# Altium PCB TX-Module-PCB.PcbDoc
Units mil, origin at the board's own origin, x right, y up, seen from the top; angles counter-clockwise.
Board outline 1978.53 x 3238.38 mil, 2 copper layers (Top Layer, Bottom Layer); 14 components, 17 nets, 76 pads, 13 vias.
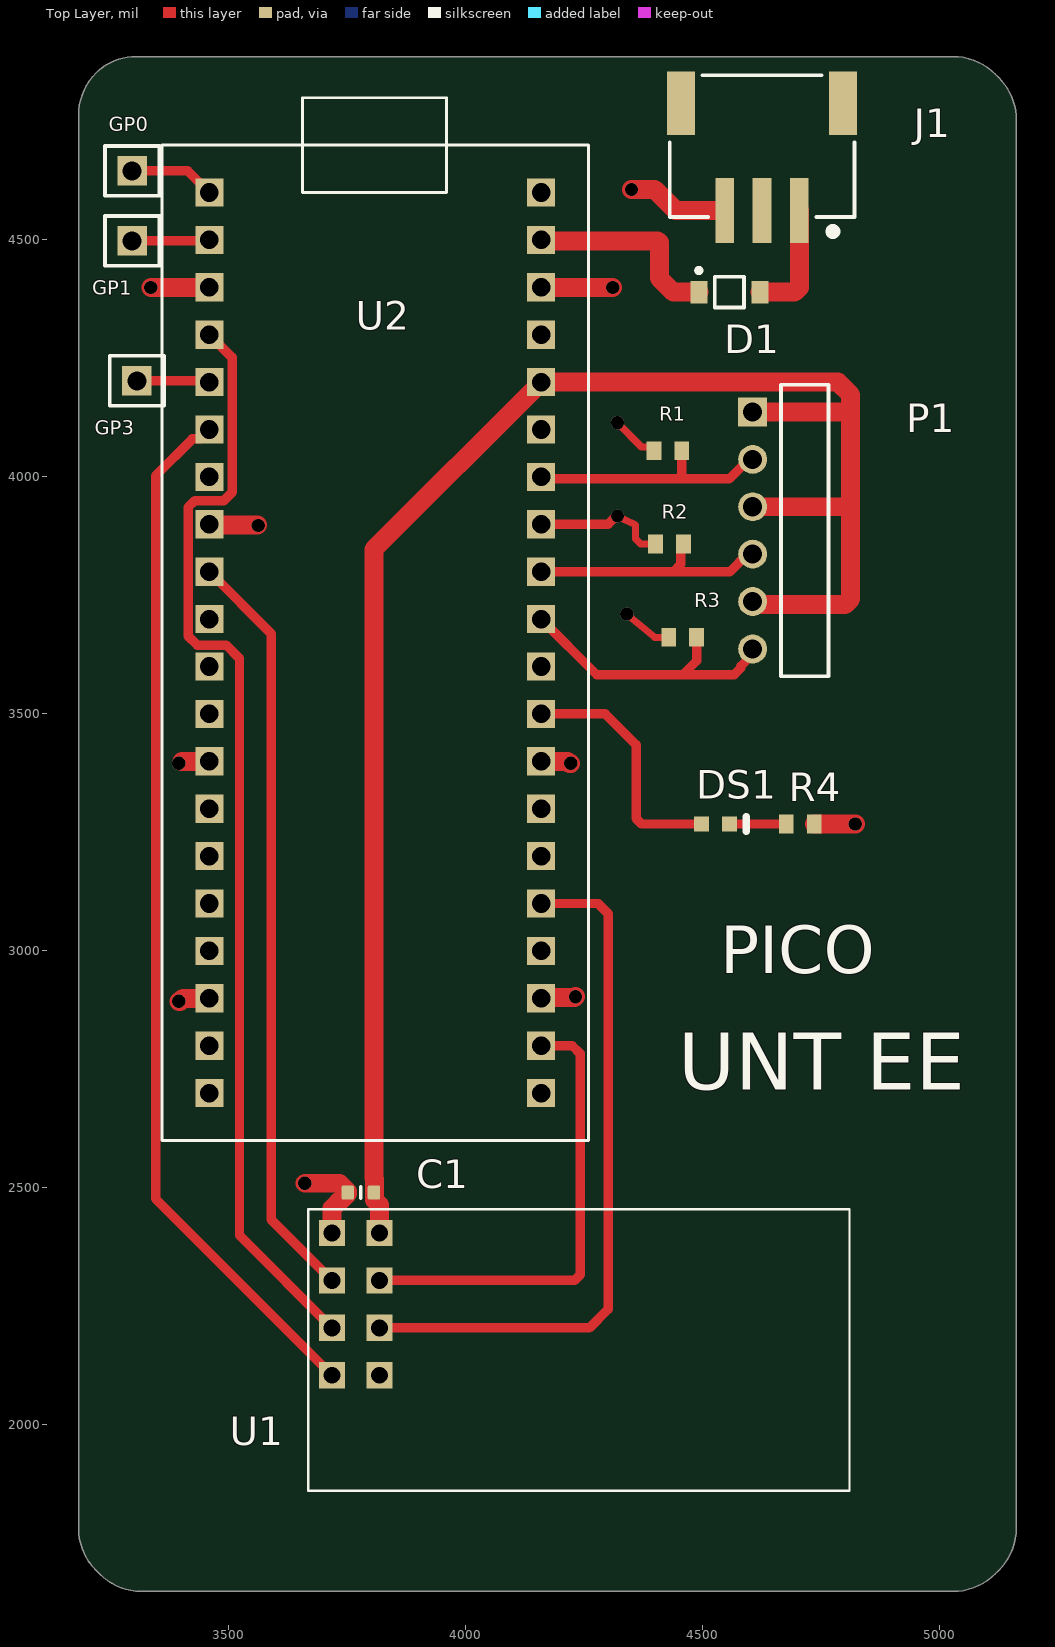
[diagram p0: Top Layer view]
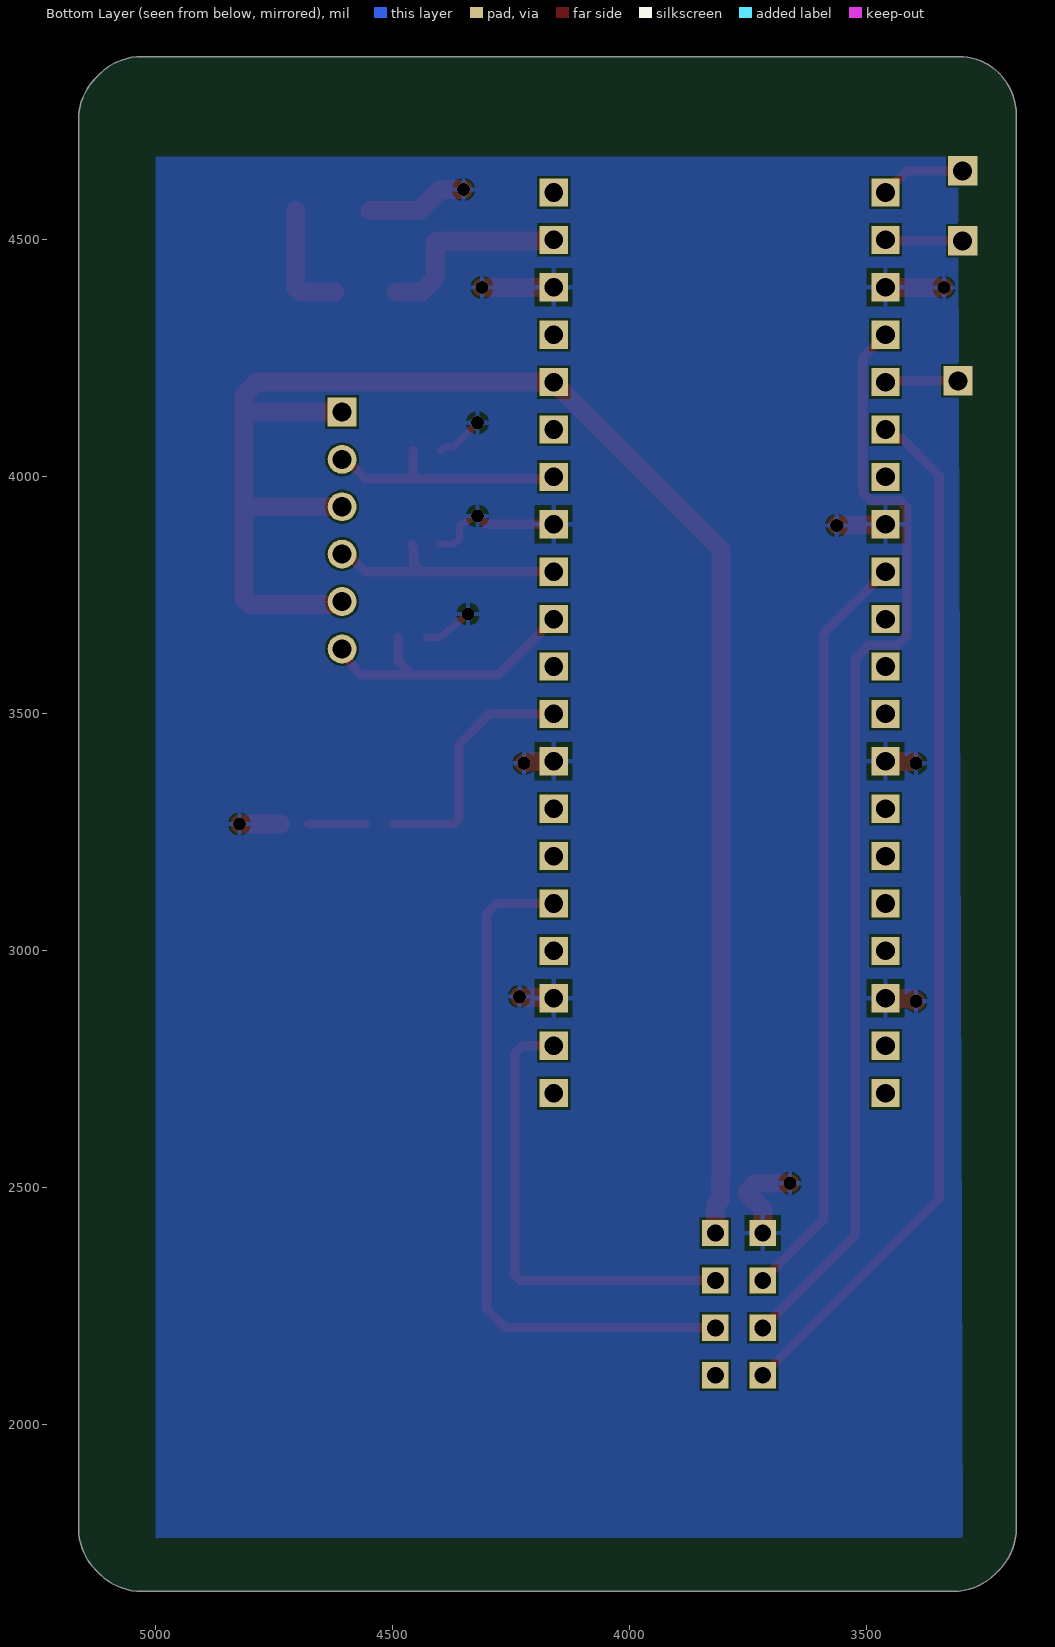
[diagram p1: Bottom Layer view, seen from below]
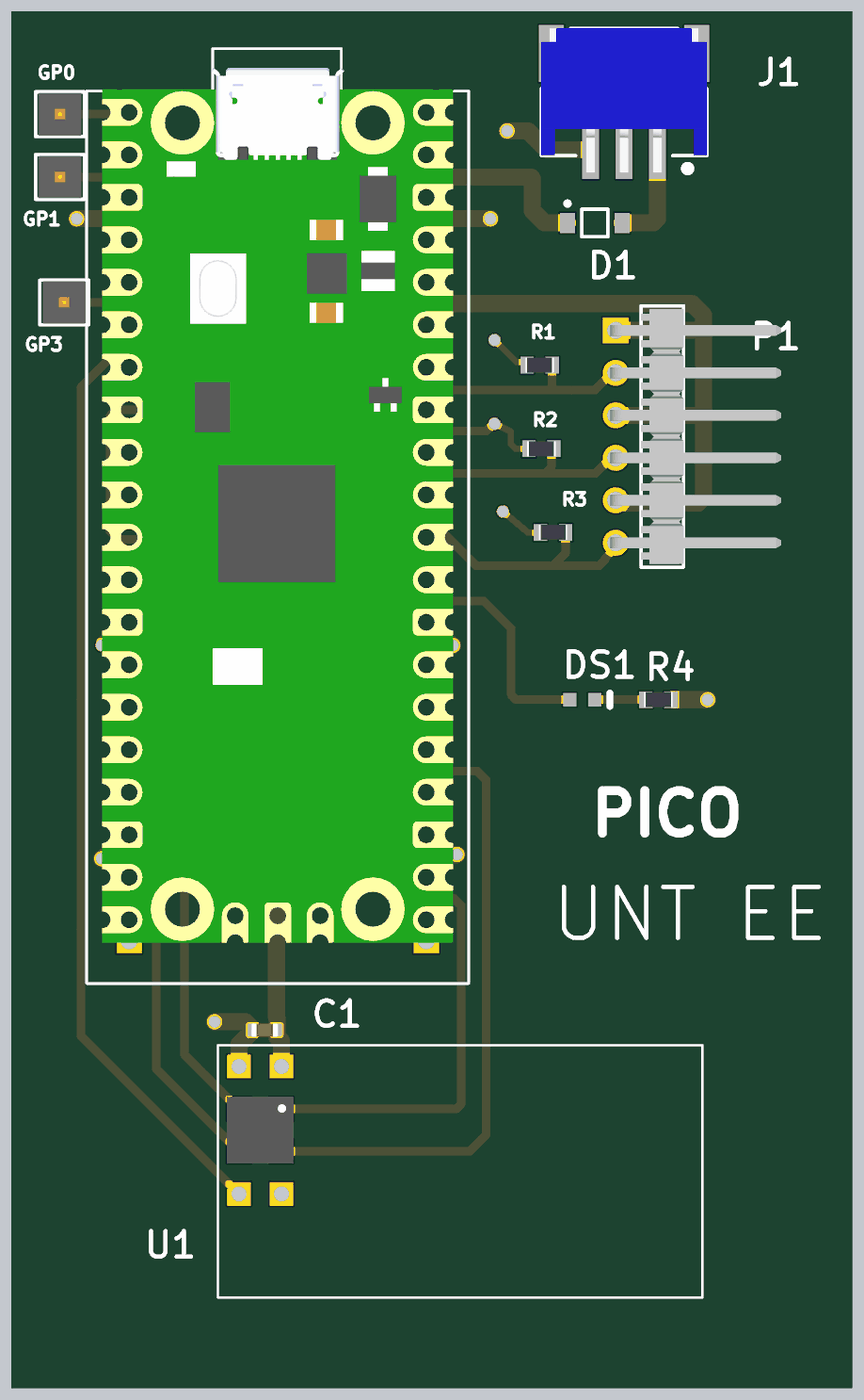
[diagram p2: 3D render of the assembled board from above, using the file's embedded part models]

## Layer stack, top to bottom
Top Solder: solder mask 0.4, Solder Resist, Dk 3.5
Top Layer: signal copper 1.4
Dielectric 1: dielectric 12.6, FR-4, Dk 4.8
Bottom Layer: signal copper 1.4
Bottom Solder: solder mask 0.4, Solder Resist, Dk 3.5

## Board outline
3220.79,1693.38 3228.82,1685.35 ccw(c3317.72,1774.25) 3304.55,1649.22 3307.09,1648.53 5028.74,1648.53 ccw(c5028.74,1774.25) 5117.58,1685.29 5117.64,1685.35 5125.67,1693.38 5125.74,1693.45 ccw(c5036.77,1782.28) 5162.5,1782.28 5162.49,1782.34 5162.5,4724.41 5162.5,4753.15 ccw(c5036.77,4753.15) 5125.67,4842.05 5117.64,4850.08 ccw(c5028.74,4761.18) 5028.74,4886.9 3305.31,4886.9 ccw(c3305.31,4767.37) 3220.79,4851.89 ccw(c3309.69,4762.99) 3183.96,4762.99 3183.96,1782.28 3183.96,1782.22 ccw(c3309.69,1782.28)

## Design rules (kind name [scope] priority, off if disabled: settings)
BoardOutlineClearance [All] p1: gap=10 ignorepadtopadclearanceinfootprint=FALSE
Clearance [All] p1: gap=5 ignorepadtopadclearanceinfootprint=FALSE
HoleSize [All] p1: absolutevalues=TRUE maxlimit=100 minlimit=11.81 maxpercent=80.000 minpercent=20.000
HoleToHoleClearance [All] p1: gap=9.84 allowstackedmicrovias=TRUE
PolygonConnect [All] p1: connectstyle=Relief reliefconductorwidth=10 reliefentries=4 polygonreliefangle="90 Angle" airgapwidth=10
RoutingVias [All] p1: holewidth=12 width=24 viastyle="Through Hole" minholewidth=12 minwidth=23.62 maxholewidth=12 maxwidth=50
SilkToSilkClearance [All] p1: silktosilkclearance=4
SilkToSolderMaskClearance [IsPad] p1: minsilkscreentomaskgap=4 clearancetoexposedcopper=TRUE
SolderMaskExpansion [All] p1: expansion=4 istentingtop=FALSE
SupplyNets "Schematic Supply Nets_1" [InNet('+3.3V')] p1: voltage=0.000
SupplyNets "Schematic Supply Nets" [InNet('GND')] p2: voltage=0.000
Width [All] p1: maxlimit=50 minlimit=5 preferedwidth=6 minimp=50.000000 maximp=50.000000 favimp=50.000000
26 further rules are at their usual default settings.

## Components (designator, comment, footprint, x,y, rotation, side; value= is the part's Value field where it differs from the comment)
C1 "Capacitor 10µF +/-20% 10V 0603" CAPC0603(1608)100_L 3779.53,2490.16 r0 top value=10µF
D1 "MBR120VLSFT1G" ONSC-SOD-123FL-2-498-01_V 4557.09,4389.76 r0 top
DS1 "19-217/R6C-AL1M2VY/3T" EVRL-0603-2_V 4527.56,3267.72 r0 top
GP0 "TSW-101-07-L-S" FP-TSW-101-07-L-S-MFG 3297.24,4645.67 r0 top (schematic designator J4)
GP1 "TSW-101-07-L-S" FP-TSW-101-07-L-S-MFG 3297.24,4498.03 r0 top (schematic designator J3)
GP3 "TSW-101-07-L-S" FP-TSW-101-07-L-S-MFG 3307.09,4202.76 r0 top (schematic designator J2)
J1 "S3B-PH-SM4-TB(LF)(SN)" JST-S3B-PH-SM4-TB-3_V 4625.98,4675.2 r180 top
P1 "TSW-106-08-G-S-RA" SMTC-TSW-106-08-X-S-RA 4606.3,4137.01 r270 top
R1 "Resistor 10k +/-1% 0603 100 mW" RESC1608X55X25ML10T15 4427.17,4055.12 r0 top value=10k
R2 "Resistor 10k +/-1% 0603 100 mW" RESC1608X55X25ML10T15 4431.1,3858.27 r0 top value=10k
R3 "Resistor 10k +/-1% 0603 100 mW" RESC1608X55X25ML10T15 4458.66,3661.42 r0 top value=10k
R4 "Resistor 1k +/-1% 0603 100 mW" RESC1608X55X25ML10T15 4706.69,3267.72 r0 top value=330
U1 "NRF24L01+" NRF24L01-PCB-AERIAL 3768.9,2254.72 r270 top
U2 "RASPBERRY_PI_PICO" RASPBERRY_PI_PICO 3810,3700 r0 top

## Footprints (in the part's own frame and the unit in brackets; to place one, negate y for a bottom-side part, rotate by r counter-clockwise, add the part's x,y. Pads: shape width x height; smd on the part's side, far side on the other; paste and mask are expansions set on the pad)
CAPC0603(1608)100_L [mm] "Chip Capacitor, Body 1.6x0.8mm, Height 1.0mm, IPC High Density"
  rrect25% 0.66x0.76 smd: 1(-0.7,0) 2(0.7,0)
  silkscreen extent 0,-0.3 0,0.3, body extent -0.8,-0.4 0.8,0.4, height 0.95
EVRL-0603-2_V [mm] "SMD, 2-Leads, Body 1.6x0.8mm"
  rect 0.8x0.8 smd: 1(-0.75,0) 2(0.75,0)
  silkscreen extent 1.65,-0.4 1.65,0.4, body extent -0.8,-0.4 0.8,0.4, height 0.5
FP-TSW-101-07-L-S-MFG [mm]
  rect 1.57x1.57 hole 1.02 paste-2539.97 mask+0: 1(0,0)
  silkscreen extent -1.46,-1.34 1.46,1.34, body extent -1.56,-1.44 1.56,1.44, height 0.25
JST-S3B-PH-SM4-TB-3_V [mm] "Header, 3-Leads, Body 9.9x7.6mm, Pitch 2mm, JST"
  rect 1x3.5 smd: 1(-2,2.875) 2(0,2.875) 3(2,2.875)
  rect 1.5x3.4 smd: NC1(-4.35,-2.875) NC2(4.35,-2.875)
  silkscreen extent -4.95,-4.37 4.95,4.2, body extent -4.95,-4.37 4.95,4.23, height 5.6
NRF24L01-PCB-AERIAL [mm]
  rect 1.408x1.408 / inner round 1.408 / far side rect 1.408x1.408 hole 0.9: P$1(-3.81,-1.27) P$2(-3.81,1.27) P$3(-1.27,-1.27) P$4(-1.27,1.27) P$5(1.27,-1.27) P$6(1.27,1.27) P$7(3.81,-1.27) P$8(3.81,1.27)
  silkscreen extent -5.08,-2.54 10,26.46, body extent -2,-2 2,2, height 0.95
ONSC-SOD-123FL-2-498-01_V [mm] "SOD, 2-Leads, Body 2.7x1.65mm"
  rect 0.91x1.22 smd: 1(-1.635,0) 2(1.635,0)
  silkscreen extent -1.76,-0.82 0.78,1.28, body extent -1.35,-0.82 1.35,0.82, height 1
RASPBERRY_PI_PICO [mm]
  rect 1.508x1.508 / inner round 1.508 / far side rect 1.508x1.508 hole 1: 3V3(8.89,12.7) 3V3_EN(8.89,15.24) ADC_VREF(8.89,10.16) AGND(8.89,5.08) GND(8.89,17.78) GND2(8.89,-7.62) GND3(8.89,-20.32) GND4(-8.89,17.78) GND5(-8.89,5.08) GND6(-8.89,-7.62) GND7(-8.89,-20.32) GP0(-8.89,22.86) GP1(-8.89,20.32) GP2(-8.89,15.24) GP3(-8.89,12.7) GP4(-8.89,10.16) GP5(-8.89,7.62) GP6(-8.89,2.54) GP7(-8.89,0) GP8(-8.89,-2.54) GP9(-8.89,-5.08) GP10(-8.89,-10.16) GP11(-8.89,-12.7) GP12(-8.89,-15.24) GP13(-8.89,-17.78) GP14(-8.89,-22.86) GP15(-8.89,-25.4) GP16(8.89,-25.4) GP17(8.89,-22.86) GP18(8.89,-17.78) GP19(8.89,-15.24) GP20(8.89,-12.7) GP21(8.89,-10.16) GP22(8.89,-5.08) GP26_A0(8.89,0) GP27_A1(8.89,2.54) GP28_A2(8.89,7.62) RUN(8.89,-2.54) VBUS(8.89,22.86) VSYS(8.89,20.32)
  silkscreen extent -11.43,-27.94 11.43,27.94, body extent -10.5,-25.5 10.5,26.8, height 3.73
RESC1608X55X25ML10T15 [mm] "Chip Resistor, 2-Leads, Body 1.70x0.90mm, IPC Low Density"
  rect 0.8x1 smd: 1(-0.75,0) 2(0.75,0)
  body extent -0.85,-0.45 0.85,0.45, height 0.55
SMTC-TSW-106-08-X-S-RA [mm] ".025 SQ Post Terminal Strip Assembly, 1x6 Pins, Right Angle, 2.54mm Pitch, Male"
  rect 1.55x1.55 hole 1.02: 1(0,0)
  round 1.55 hole 1.02: 2(2.54,0) 3(5.08,0) 4(7.62,0) 5(10.16,0) 6(12.7,0)
  silkscreen extent -1.46,1.52 14.16,4.06, body extent -1.27,-0.32 13.97,9.9, height 3.05

## Part data
C1: library part CMP-001-00075-4, "Chip Capacitor, 10µF +/-20%, 10V, 0603, Thickness 1 mm", Case/Package=0603, Max Operating Temperature=85°C, Min Operating Temperature=-55°C, Tolerance=10%, Voltage Rating=10V, Mounting Technology=SMT, Pins=2
D1: library part CMP-1055-00449-1, "Schottky Power Rectifier, 2-Pin SOD-123, Pb-Free, Tape and Reel", Manufacturer="On Semiconductor", ComponentLink1Description="Manufacturer URL", ComponentLink1URL=http://www.onsemi.com/, ComponentLink2Description=Datasheet, ComponentLink2URL=http://www.onsemi.cn/pub_link/Collateral/MBR120VLSFT1-D.PDF, ComponentLink3Description="Package Specification", ComponentLink3URL=http://www.onsemi.cn/pub_link/Collateral/MBR120VLSFT1-D.PDF, Configuration=Single, DatasheetVersion="Rev. 2", IFSM Max (A)=45, Mounting Technology="Surface Mount", PackageDescription="2-Pin SOD, Body 1.65 x 2.7 mm", PackageReference=SOD-123FL-2-498-01, PackageVersion="Rev. A", Packing="Tape and Reel", PartNumber=MBR120VLSFT1G, RoHS=TRUE
DS1: library part CMP-007-00004-2, "Chip LED, Red, 5 V, 25 mA, -40 to 85 degC, 2-Pin SMD (0603), RoHS, Tape and Reel", Case/Package=0603, Colour=Red, Forward Voltage=2.2V, Manufacturer="Everlight Electronics", Package Description="2-Pin Surface Mount Device, Body 1.6 x 0.8 mm", Datasheet URL=https://datasheet.ciiva.com/4688/el-19-217-r6c-al1m2vy-3tpdf-187026-4688713.pdf, Datasheet Version="Rev. 1, 01/2005", Lens Style=Clear, Manufacturer URL=http://www.everlight.com/, Mounting Technology=SM, Package Reference=0603, RoHS Compliant=False
GP0 GP1 GP3: library part CMP-02766-001775-1, "CONN HEADER VERT 1POS", Color=Black, Flammability Rating="UL94 V-0", Max Current Rating=7.6A, Max Operating Temperature=125°C, Max Voltage Rating (AC)=550V, Min Operating Temperature=-55°C, Connector Type=Header, Contact Finish - Mating=GOLD, Contact Material=Bronze, Contact Mating Length=0.23inch, Contact Plating=Gold, Contact Shape=Square, Contact Type="Male Pin", Depth=2.54mm, Fastening Type=Pull, Gender=Male, Housing Color=Black, Housing Material=Polyester, Insulation Color=Black, Insulation Material=PBT, Lead Free="Lead Free", Length=2.54mm, Mount="Through Hole", Number of Contacts=1, Number of Positions=1, Number of Rows=1, Orientation=Straight, Packaging=Bulk, Radiation Hardening=No, Reach SVHC Compliant=Yes, RoHS Compliant=Yes, Series=TSW, Termination=Solder, Width=2.54mm
J1: library part JST_S3B-PH-SM4-TB, "Conn., PCB to wire (battery), right angle, SMT, 2mm pitch, low profile, 2A per pin, 3Circuits", Manuf1=JST, Source1Partnumber=455-1750-1-ND, Source2Partnumber=455-1750-2-ND, ComponentLink1Description="Manufacturer Web", ComponentLink2Description="Datasheet Web", ComponentLink3Description="Digikey Web", LatestRevisionDate=23-October-2017, Manuf1Partnumber=S3B-PH-SM4-TB(LF)(SN), Populated=Yes, RoHS=Yes, Source1=Digikey, Source1Price=0.4929, Source1Qty=100, Source2=Digikey, Source2Price=0.26302, Source2Qty=10000
P1: library part CMP-1024-00387-1, "0.025\" SQ Post Header, Through-hole, Right Angle, -55 to 125 degC, 2.54 mm Pitch, 6-Pin, Male, RoHS", Manufacturer=Samtec, Temperature Range="-55 to 125 degC", ComponentLink1Description="Manufacturer URL", ComponentLink1URL=http://www.samtec.com, ComponentLink2Description=Datasheet, ComponentLink2URL=http://www.samtec.com/documents/webfiles/pdf/TSW_TH.PDF, ComponentLink3Description="Package Specification", ComponentLink3URL=http://www.samtec.com/documents/webfiles/cpdf/TSW-XXX-XX-XXX-X-XX-XXX-MKT.pdf, DatasheetVersion=F-214, Mounting Technology=Through-hole, Orientation="Right Angle", PackageDescription=".025[0.64] SQ. Post Terminal Strip Assembly", PackageReference=TSW-106-08-X-S-RA, PackageVersion="DM, 8/1988", PartNumber=TSW-106-08-G-S-RA, Pitch="2.54 mm", RoHS=True
R1 R2 R3: library part CMP-009-00017-5, "Chip Resistor, 10 KOhm, +/- 1%, 01 W, -55 to 155 degC, 0603 (1608 Metric)", Case/Package=0603, Max Operating Temperature=155°C, Min Operating Temperature=-55°C, Power=100mW, Tolerance=1%, Voltage Rating=50V, Mounting Technology=SM, Pins=2, RoHS Compliant=True
R4: library part CMP-009-00014-5, "Chip Resistor, 1 KOhm, +/-1%, 0.1 W, -55 to 155 degC, 0603 (1608 Metric)", Case/Package=0603, Max Operating Temperature=155°C, Min Operating Temperature=-55°C, Power=100mW, Tolerance=1%, Voltage Rating=50V, Mounting Technology=SM, Pins=2, RoHS Compliant=True
U1: "IC RF TxRx Only General ISM > 1GHz 2.4GHz 20-VFQFN Exposed Pad", Package="QFN-20 Nordic Semiconductor", Check_prices=https://www.snapeda.com/parts/NRF24L01+/Nordic+Power/view-part/?ref=eda, MF="Nordic Semiconductor", MP=NRF24L01+, SnapEDA_Link=https://www.snapeda.com/parts/NRF24L01+/Nordic+Power/view-part/?ref=snap
U2: "Raspberry Pi Board, Arm Cortex-M0+; Core Architecture:Arm; Core Sub-Architecture:Cortex-M0+; Kit Contents:Raspberry Pi Pico Board; No. Of Bits:32Bit; Silicon Core Number:Rp2040; Silicon Manufacturer:Raspberry Pi", Package=None, Check_prices=https://www.snapeda.com/parts/RASPBERRY%20PI%20PICO/Raspberry+Pi/view-part/?ref=eda, MF="Raspberry Pi", MP="RASPBERRY PI PICO", SnapEDA_Link=https://www.snapeda.com/parts/RASPBERRY%20PI%20PICO/Raspberry+Pi/view-part/?ref=snap

## Via types
v1: diameter 28, hole 28, Top Layer to Bottom Layer, 13 vias

## Nets (pads, with @x,y where several pads share a name; then routed paths per layer and width w, separated by ;. In a path a pad name is that pad's centre, name@x,y a point inside that pad or via, vN(x,y) a via of type N, cw(c..) or ccw(c..) an arc to the next point about the centre after c; other vN are vias at no path point)
+3.3V: C1.2 P1.1 P1.3 P1.5 U1.P$2 U2.3V3 | length 3670.6
  Top Layer w40: U1.P$2 3818.9,2464.18 3808.35,2474.73 3808.35,2518.42 3807.09,2519.69 3807.09,3847.09 U2.3V3 4786.22,4200 4812.99,4173.23 4812.99,4133.86 ; P1.5 4612.99,3730.32 4801.28,3730.32 4812.99,3742.03 4812.99,3937.01 ; P1.3 4812.99,3937.01 ; P1.1 4809.84,4137.01 4812.99,4133.86 ; 4812.99,3937.01 4812.99,4133.86
FLEX_1: P1.2 R1.2 U2.GP28_A2 | length 527.2
  Top Layer w20: U2.GP28_A2 4163.94,3996.06 4448.82,3996.06 ; R1.2 4456.69,4003.94 4448.82,3996.06 ; P1.2 4598.03,4037.01 4557.09,3996.06 4448.82,3996.06
FLEX_2: P1.4 R2.2 U2.GP27_A1 | length 528.9
  Top Layer w20: U2.GP27_A1 4438.98,3800 ; R2.2 4454.88,3852.52 4454.88,3815.91 4438.98,3800 ; P1.4 4595.2,3837.01 4558.19,3800 4438.98,3800
FLEX_3: P1.6 R3.2 U2.GP26_A0 | length 617.1
  Top Layer w20: U2.GP26_A0 4277.32,3582.68 4458.66,3582.68 ; R3.2 4488.19,3612.2 4458.66,3582.68 ; P1.6 4606.3,3625.91 4581.07,3600.68 4581.07,3596.82 4566.93,3582.68 4458.66,3582.68
GND: C1.1 J1.3 R1.1 R2.1 R3.1 R4.2 U1.P$1 U2.AGND U2.GND U2.GND2 U2.GND3 U2.GND4 U2.GND5 U2.GND6 U2.GND7 | length 1646.4
  Top Layer w15: v1(4320.87,3917.32) 4359,3898.87 4359,3869.34 4370.08,3858.27 R2.1 ; v1(4320.87,4114.17) 4372.35,4062.69 4390.07,4062.69 R1.1 ; v1(4340.55,3710.63) 4399.61,3661.42 R3.1
  Top Layer w20: v1(3336.61,4399.61) v1@3336.81,4399.8 ; v1(3395.67,3395.67) 3397.83,3395.67 v1@3402.16,3400 ; U2.GND4@3459.8,4399.8 U2.GND4 ; U2.GND5 U2.GND5@3461.18,3898.82 ; v1@3561.81,3898.82 v1(3562.99,3897.64) ; U2.AGND 4301.38,3900 4318.7,3917.32 v1(4320.87,3917.32) ; U2.GND U2.GND@4160.2,4399.8 ; v1@4310.83,4399.8 v1(4311.02,4399.61)
  Top Layer w40: v1@3336.81,4399.8 U2.GND4@3459.8,4399.8 ; v1(3395.67,2893.7) 3397.83,2893.7 3404.13,2900 U2.GND7 ; v1@3402.16,3400 U2.GND6 ; U2.GND5@3461.18,3898.82 v1@3561.81,3898.82 ; v1(3661.42,2509.84) 3734.24,2509.84 3751.97,2492.12 C1.1 3751.97,2488.2 3734.83,2471.06 3732.87,2471.06 3718.9,2457.09 U1.P$1 ; U2.GND3 4162.01,2902.01 4230.75,2902.01 v1(4232.28,2903.54) ; U2.GND2 4215.95,3400 4220.28,3395.67 v1(4222.44,3395.67) ; U2.GND@4160.2,4399.8 v1@4310.83,4399.8 ; v1(4350.39,4606.3) 4399.61,4606.3 4443.9,4562.01 J1.3 ; R4.2 v1(4822.83,3267.72)
LED_IN: DS1.1 U2.GP22 | length 525.4
  Top Layer w20: U2.GP22 4295.28,3500 4360.24,3435.04 4360.24,3279.43 4371.95,3267.72 DS1.1
NetD1_1: D1.1 U2.VSYS | length 422.4
  Top Layer w40: U2.VSYS 4161.97,4498.03 4405.93,4498.03 4409.45,4494.52 4409.45,4419.29 4438.98,4389.76 D1.1
NetD1_2: D1.2 J1.1 | length 249.7
  Top Layer w40: D1.2 4694.88,4389.76 4704.72,4399.61 J1.1
NetDS1_2: DS1.2 R4.1 | length 120.1
  Top Layer w20: DS1.2 R4.1
RxTx_CE: U1.P$3 U2.GP6 | length 1602.5
  Top Layer w20: U2.GP6 3590.43,3669.57 3590.43,2433.19 U1.P$3
RxTx_CSN: U1.P$4 U2.GP17 | length 984.1
  Top Layer w20: U1.P$4 4230.41,2304.72 4242.13,2316.44 4242.13,2783.56 4225.69,2800 U2.GP17
RxTx_MISO: U1.P$7 U2.GP4 | length 2205.9
  Top Layer w20: U2.GP4 3440.31,4080.31 3424.38,4080.31 3346.46,4002.4 3346.46,2477.17 U1.P$7
RxTx_MOSI: U1.P$6 U2.GP19 | length 1483.3
  Top Layer w20: U1.P$6 4261.81,2204.72 4301.18,2244.09 4301.18,3078.84 4280.02,3100 U2.GP19
RxTx_SCK: U1.P$5 U2.GP2 | length 2350.9
  Top Layer w20: U2.GP2 3507.97,4252.03 3507.97,3967.39 3490.58,3950 3429.42,3950 3415.31,3935.9 3415.31,3664.1 3434.73,3644.69 3495.9,3644.69 3523.62,3616.96 3523.62,2400 U1.P$5
Spare1: GP0.1 U2.GP0 | length 181.7
  Top Layer w20: GP0.1 3414.33,4645.67 U2.GP0
Spare2: GP1.1 U2.GP1 | length 163.6
  Top Layer w6: U2.GP1@3458.03,4498.03 U2.GP1
  Top Layer w20: GP1.1 U2.GP1@3458.03,4498.03
Spare3: GP3.1 U2.GP3 | length 154.1
  Top Layer w6: U2.GP3@3457.24,4202.76 U2.GP3
  Top Layer w20: GP3.1 U2.GP3@3457.24,4202.76
pads on no net: J1.2 J1.NC1 J1.NC2 U1.P$8 U2.3V3_EN U2.ADC_VREF U2.GP5 U2.GP7 U2.GP8 U2.GP9 U2.GP10 U2.GP11 U2.GP12 U2.GP13 U2.GP14 U2.GP15 U2.GP16 U2.GP18 U2.GP20 U2.GP21 U2.RUN U2.VBUS

## Polygon pours and split planes (outlines as drawn)
GND on Bottom Layer "GND_L02_P002" (solid, pour order 2): 3307.09,4685.04 3316.93,4675.2 5000,4675.2 5000,1761.81 3297.24,1761.81

## Silkscreen, mask and mechanical layers (free items; w line width, h text height)
Top Overlay:
  text "UNT EE" at 4448.98,2706.85 h120
Mechanical 1:
  lines w10: 3307.09,1653.54 5028.74,1653.54 ccw(c5028.74,1774.25) 5114.1,1688.9 5122.13,1696.93 ; 3317.72,1653.54 cw(c3317.72,1774.25) 3232.36,1688.9 3224.33,1696.93 cw(c3309.69,1782.28) 3188.98,1782.28 3188.98,1811.02 3188.98,4674.41 3188.98,4762.99 cw(c3309.69,4762.99) 3224.33,4848.35 cw(c3305.31,4767.37) 3305.31,4881.89 5028.74,4881.89 cw(c5028.74,4761.18) 5114.1,4846.53 5122.12,4838.51 cw(c5036.77,4753.15) 5157.48,4753.15 5157.48,4724.41 5157.48,1782.28 cw(c5036.77,1782.28) 5122.12,1696.93

## Text inside footprints (layer, text, board x,y; h text height)
U2: Top Overlay "PICO" at 4537.4,2952.76 h100